# EAGLE board edp_to_DP (EAGLE 9.4.2)
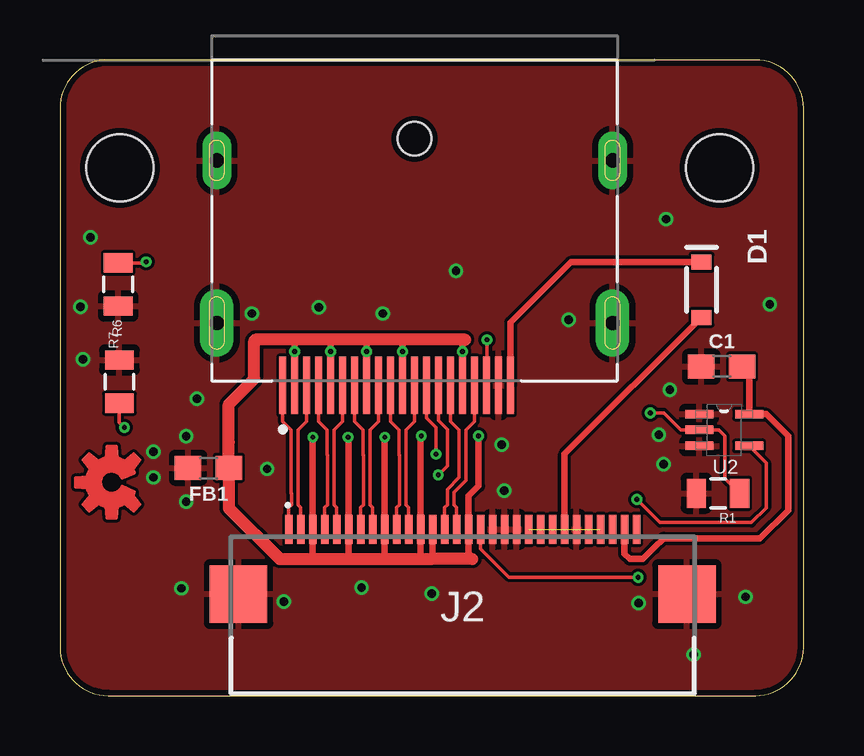
[diagram p0: board, top side]
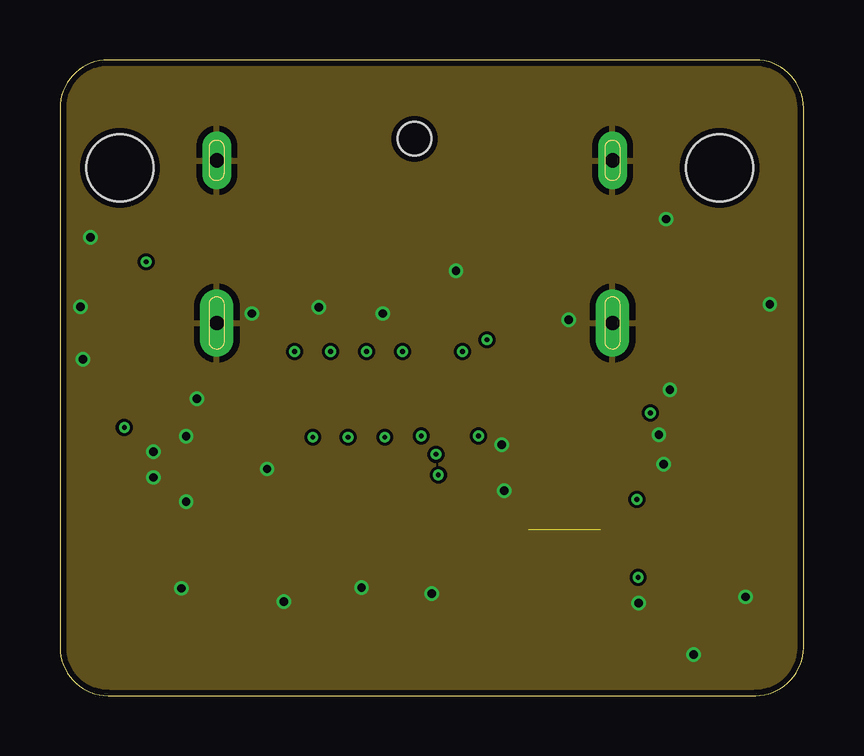
[diagram p1: board, inner layer Route2]
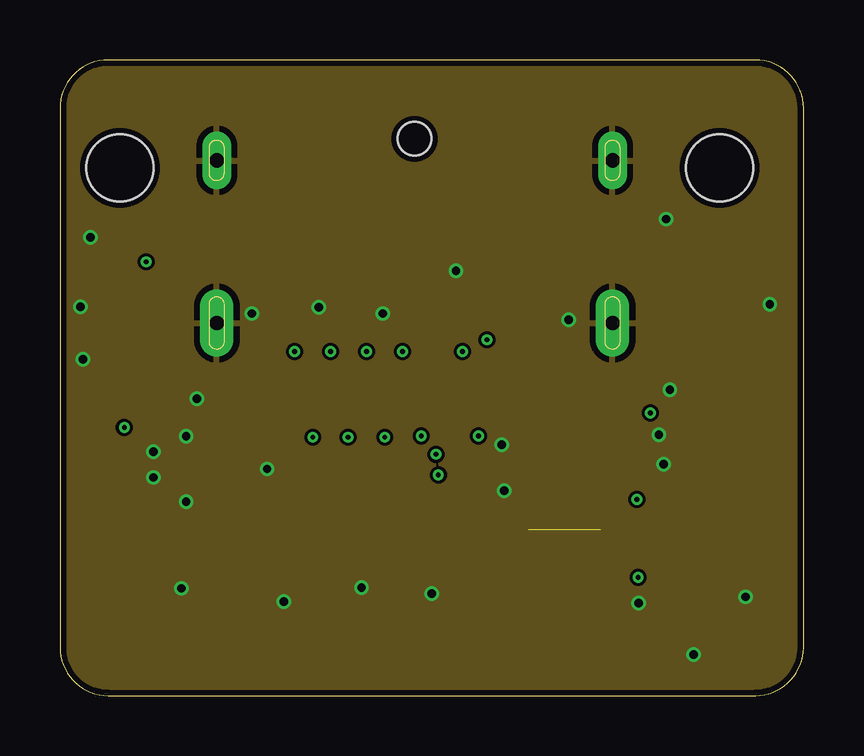
[diagram p2: board, inner layer Route15]
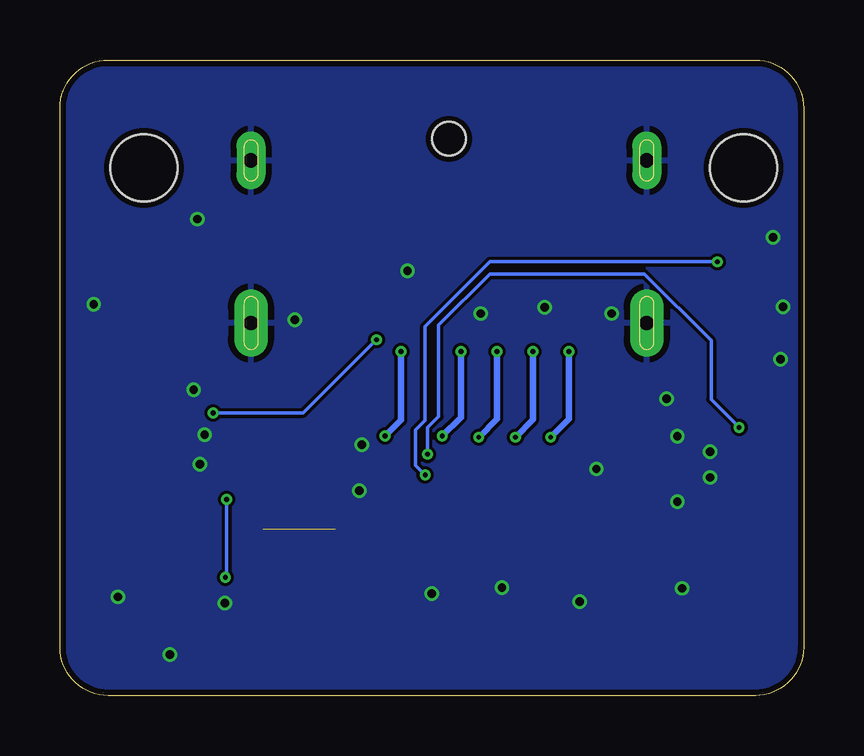
[diagram p3: board, bottom side, seen from below]

Size 31 x 26.5 mm. Coordinates in mm from the lower left corner, seen from the top.
Outline: 0,24.5 0,2 arc90 2,0 29,0 arc90 31,2 31,24.5 arc90 29,26.5 2,26.5 arc90 0,24.5
Copper layers (1+2*15+16): Top 0.035mm / dielectric 0.2mm / Route2 0.0175mm / dielectric 0.265mm / Route15 0.0175mm / dielectric 0.2mm / Bottom 0.035mm
Design rules "DLT-4Layer": minimum track width 6mil, minimum drill 0.2mm, track to track 5mil, track to pad 4mil, pad to pad 4mil, via to via 4mil, smd to smd 0mil, copper to edge 10mil, drill to drill 10mil, minimum pad ring 10mil, minimum via ring 0.125mm, stop-mask expansion 2mil, vias tented up to drill 100mil, thermal gap 10mil
Holes 2.8 mm at 2.5,22 27.5,22

## Footprints (pad centres in the part's own frame; a part is rotated, then mirrored left to right if it is on the bottom)
0603 = smd 1.1 x 1: 1 -0.85,0; 2 0.85,0
SOD-323 = smd 0.63 x 0.83: A 1.15,0; C -1.15,0
54132-3062 = smd 0.3 x 1.2: 1 -7.25,0.3; 2 -6.75,0.3; 3 -6.25,0.3; 4 -5.75,0.3; 5 -5.25,0.3; 6 -4.75,0.3; 7 -4.25,0.3; 8 -3.75,0.3; 9 -3.25,0.3; 10 -2.75,0.3; 11 -2.25,0.3; 12 -1.75,0.3; 13 -1.25,0.3; 14 -0.75,0.3; 15 -0.25,0.3; 16 0.25,0.3; 17 0.75,0.3; 18 1.25,0.3; 19 1.75,0.3; 20 2.25,0.3; 21 2.75,0.3; 22 3.25,0.3; 23 3.75,0.3; 24 4.25,0.3; 25 4.75,0.3; 26 5.25,0.3; 27 5.75,0.3; 28 6.25,0.3; 29 6.75,0.3; 30 7.25,0.3 | smd 2.4 x 2.4: 31 -9.35,-2.4; 32 9.35,-2.4
MOLEX_47272-0001 = smd 0.28 x 2.4: 1 5.5,13.56; 2 5,13.56; 3 4.5,13.56; 4 4,13.56; 5 3.5,13.56; 6 3,13.56; 7 2.5,13.56; 8 2,13.56; 9 1.5,13.56; 10 1,13.56; 11 0.5,13.56; 12 0,13.56; 13 -0.5,13.56; 14 -1,13.56; 15 -1.5,13.56; 16 -2,13.56; 17 -2.5,13.56; 18 -3,13.56; 19 -3.5,13.56; 20 -4,13.56 | drill 0.6 pad 1.4 long: S1 -8.25,10.96; S2 8.25,10.96 | drill 0.6 pad 1.2 long: S3 -8.25,4.18; S4 8.25,4.18 | hole 1.4: 0,3.28
0805 = smd 0.8 x 1.2: 1 -0.9,0; 2 0.9,0
SOT65P210X110-5N = smd 1.168 x 0.356: 1 -1.041,0.66; 2 -1.041,0; 3 -1.041,-0.66; 4 1.041,-0.66; 5 1.041,0.66

## Placement (x,y rotation side)
C1  0.1uF  [0603]  27.59,13.72 0 top
D1  1A/23V/620mV  [SOD-323]  26.74,16.92 270 top
FB1  .25/3A  [0603]  6.19,9.49 180 top
J2  54132-3062  [54132-3062]  16.79,6.63 0 top
J3  47272-0001  [MOLEX_47272-0001]  14.78,26.49 180 top
LOGO1  OSHW-LOGOS-COPPER  [OSHW-LOGO-S_COPPER]  2.15,8.89 90 top
R1  100k  [0805]  27.43,8.43 180 top
R6  1M  [0805]  2.48,13.09 270 top
R7  1M  [0805]  2.43,17.14 90 top
U2  SN74LV1T125DCKR  [SOT65P210X110-5N]  27.69,11.07 0 top

## Library data of the parts
C1 = SparkFun-Capacitors; PROD_ID: CAP-00867
D1 = SparkFun-DiscreteSemi; PROD_ID: DIO-11623
FB1 = SparkFun-Coils; PROD_ID: NDUC-13805
J2 = 54132-3062; DESCRIPTION: Connector 0.5mm, FFC/FPC, SMT,r/a,30w,Au Molex FFC/FPC SMT Series 0.5mm Pitch 30 Way Right Angle SMT Female FPC Connector, ZIF Bottom Contact; HEIGHT: mm; MANUFACTURER_NAME: Molex; MANUFACTURER_PART_NUMBER: 54132-3062; MOUSER_PART_NUMBER: 538-54132-3062; MOUSER_PRICE-STOCK: https://www.mouser.com/Search/Refine.aspx?Keyword=538-54132-3062
J3 = 47272-0001; AVAILABILITY: Unavailable; DESCRIPTION: Conn Display Port RCP 20 POS 0.5mm Solder RA SMD 20 Terminal 1 Port DisplayPort T/R; MF: Molex; MP: 47272-0001; PACKAGE: None; PRICE: None
LOGO1 = SparkFun-Aesthetics
R1 R6 R7 = SparkFun-Passives
U2 = SN74LV1T125DCKR; AVAILABILITY: Unavailable; DESCRIPTION: Single Power Supply, Single BUFFER GATE w/ 3-State Output _active low enable_ 5-SC70 -40 to 125; MF: Texas Instruments; MP: SN74LV1T125DCKR; PACKAGE: SC-70-5 Texas Instruments; PRICE: None

## Nets
1.8V: C1.2 J2.29 U2.5
3V3: D1.C J3.20
5V: J2.21 J2.27
CONFIG3: J3.13 R6.2
CONFIG4: J3.14 R7.2
DP_GND: FB1.1 J2.3 J2.6 J2.9 J2.12 J2.13 J2.16 J3.2 J3.5 J3.8 J3.11 J3.16
DP_HPD_IN: J3.18 R1.1 U2.2
DP_PWR_3V3: D1.A J2.24
EDP0_TX_C_N: J2.2 J3.3
EDP0_TX_C_P: J2.1 J3.1
EDP1_TX_C_N: J2.5 J3.6
EDP1_TX_C_P: J2.4 J3.4
EDP2_TX_C_N: J2.8 J3.9
EDP2_TX_C_P: J2.7 J3.7
EDP3_TX_C_N: J2.11 J3.12
EDP3_TX_C_P: J2.10 J3.10
EDP_AUX_N: J2.15 J3.17
EDP_AUX_P: J2.14 J3.15
EDP_HPD: J2.17 U2.4
GEN2_I2C_SCL: J2.23
GEN2_I2C_SDA: J2.22
GND: C1.1 FB1.2 J2.18 J2.19 J2.20 J2.25 J2.31 J2.32 J3.19 J3.S1 J3.S2 J3.S3 J3.S4 R1.2 R6.1 R7.1 U2.1 U2.3
GPIO13_PE6_PWM: J2.28
LCD_BL_EN: J2.26
LCD_BL_PWM: J2.30

## Tracks (layer width: path | path; a pad name or v marks a point on that pad's centre or on a via)
1.8V
  Top 0.279: C1.2 28.73,13.42 U2.5 29.44,11.73 30.35,10.82 30.35,7.72 29.19,6.55 25.17,6.55 24.77,6.15 24.31,5.69 23.75,5.69 23.54,5.9 J2.29
3V3
  Top 0.279: D1.C 21.29,18.07 18.78,15.56 J3.20
5V  (1 unrouted)
CONFIG3  (via drill 0.2)
  Top 0.152: J3.13 15.28,11.56 15.67,11.18 v15.67,10.06 | v2.68,11.18 2.48,11.38 R6.2
  Bottom 0.152: v15.67,10.06 15.67,11.18 15.22,11.63 15.22,15.44 13.08,17.58 6.64,17.58 3.85,14.79 3.85,12.34 v2.68,11.18
CONFIG4  (via drill 0.2)
  Top 0.152: J3.14 15.78,11.46 16.15,11.09 16.15,9.57 v15.78,9.2 | v3.6,18.09 3.55,18.04 R7.2
  Bottom 0.152: v15.78,9.2 16.18,9.6 16.18,11.06 15.78,11.47 15.78,15.39 13.08,18.09 v3.6,18.09
DP_GND  (via drill 0.2)
  Top 0.279: J3.16 v16.78,14.35 16.78,14.72 16.89,14.83 | J3.11 v14.28,14.35 14.28,14.8 14.25,14.83 | J3.8 v12.78,14.35 12.78,14.83 | J3.5 v11.28,14.35 11.28,14.8 11.25,14.83 | J3.2 v9.78,14.35 9.78,14.83 | 10.54,5.69 J2.3 v10.54,10.77 | 12.07,5.69 12.04,5.71 J2.6 12.04,10.74 v12.02,10.77 | 13.59,5.69 13.54,5.74 J2.9 v13.54,10.77 | 15.16,5.69 15.04,5.81 J2.12 15.04,10.8 v15.06,10.82 | J2.13 15.54,5.76 15.47,5.69 | 17.2,5.69 17.04,5.85 J2.16 17.04,8.33 17.45,8.74 v17.45,10.82
  Top 0.508: 16.89,14.83 14.25,14.83 12.78,14.83 11.25,14.83 9.78,14.83 8.16,14.83 8.1,14.78 8.1,13.21 7.04,12.14 7.04,10.57 FB1.1 7.04,7.82 9.17,5.69 10.54,5.69 12.07,5.69 13.59,5.69 15.16,5.69 15.47,5.69 17.2,5.69
  Bottom 0.279: v10.54,10.77 9.78,11.53 v9.78,14.35 | v12.02,10.77 11.28,11.5 v11.28,14.35 | v13.54,10.77 12.78,11.53 v12.78,14.35 | v15.06,10.82 14.28,11.6 v14.28,14.35 | v17.45,10.82 16.78,11.49 v16.78,14.35
DP_HPD_IN  (via drill 0.2)
  Top 0.152: R1.1 27.71,9.05 27.71,10.82 27.46,11.07 U2.2 25.88,11.07 25.17,11.79 v24.61,11.79 | v17.81,14.83 17.81,12.96 J3.18
  Bottom 0.152: v24.61,11.79 20.86,11.79 v17.81,14.83
DP_PWR_3V3
  Top 0.279: J2.24 21.04,10.06 D1.A
EDP0_TX_C_N
  Top 0.152: J3.3 10.28,11.43 9.92,11.07 9.92,8.64 9.93,8.63 9.93,8.33 9.93,7.94 10.04,7.83 J2.2
EDP0_TX_C_P
  Top 0.152: J3.1 9.28,11.43 9.64,11.07 9.64,8.44 9.65,8.43 9.65,8.13 9.65,7.94 9.54,7.83 J2.1
EDP1_TX_C_N
  Top 0.152: J3.6 11.78,11.43 11.42,11.07 11.42,10.67 11.43,10.67 11.43,9.22 11.43,9.21 11.43,9.16 11.43,8.28 11.43,7.94 11.54,7.83 J2.5
EDP1_TX_C_P
  Top 0.152: J3.4 10.78,11.43 11.14,11.07 11.14,10.04 11.15,10.03 11.15,9.1 11.15,8.28 11.15,8.08 11.15,7.94 11.04,7.83 J2.4
EDP2_TX_C_N
  Top 0.152: J3.9 13.28,11.43 12.92,11.07 12.92,10.67 12.93,10.67 12.93,9.27 12.93,9.21 12.93,8.38 12.93,7.94 13.04,7.83 J2.8
EDP2_TX_C_P
  Top 0.152: J3.7 12.28,11.43 12.64,11.07 12.64,10.04 12.65,10.03 12.65,9.15 12.65,8.38 12.65,8.18 | J2.7 12.54,7.83 12.65,7.94 12.65,8.18 | 12.65,8.18
EDP3_TX_C_N
  Top 0.152: J3.12 14.78,11.43 14.42,11.07 14.42,10.67 14.43,10.67 14.43,9.29 14.43,9.23 14.43,8.44 14.43,8.43 14.43,7.94 14.54,7.83 J2.11
EDP3_TX_C_P
  Top 0.152: J3.10 13.78,11.43 14.14,11.07 14.14,10.04 14.15,10.03 14.15,9.18 14.15,9.17 14.15,8.43 14.15,8.23 | J2.10 14.04,7.83 14.15,7.94 14.15,8.23 | 14.15,8.23
EDP_AUX_N
  Top 0.152: J3.17 17.28,11.43 16.92,11.07 16.92,8.97 16.43,8.48 16.43,7.94 16.54,7.83 J2.15
EDP_AUX_P
  Top 0.152: J3.15 16.28,11.43 16.64,11.07 16.64,9.09 16.15,8.6 16.15,7.94 16.04,7.83 J2.14
EDP_HPD  (via drill 0.2)
  Top 0.152: U2.4 29.44,9.7 29.44,7.82 28.83,7.21 25.02,7.21 v24.05,8.18 | v24.11,4.93 18.72,4.93 17.54,6.11 J2.17
  Bottom 0.152: v24.05,8.18 24.05,4.98 v24.11,4.93
GND  (via drill 0.35)
  other vias: 5.06,4.47 9.34,3.91 18.52,8.53 28.58,4.11 0.96,14.02 0.86,16.21 25.43,12.75 25.17,9.65 24.97,10.87 3.89,10.16 3.89,9.09 5.26,10.82 5.26,8.08 24.13,3.86 26.42,1.7 15.5,4.24 12.57,4.5 18.42,10.46 8.64,9.45 5.72,12.37 10.8,16.18 13.46,15.93 8,15.93 21.21,15.67 16.51,17.7 1.27,19.1 25.27,19.86 29.59,16.31
  pour Top: -0.57,-0.51 -0.57,27.28 31.68,27.28 31.68,-0.51
  pour Bottom: -1.53,28.35 -1.53,-1.37 32.54,-1.37 32.54,28.35
  pour Route2: -0.5,28 31.5,28 31.5,0 -0.5,0
  pour Route15: -1.5,29 -1.5,-1 32.5,-1 32.5,29

## Text on the board
tStop: eDP-DP